# Altium PCB HSens.PcbDoc
Units mil, origin at the board's own origin, x right, y up, seen from the top; angles counter-clockwise.
Board outline 1750 x 1600 mil, 2 copper layers (Top Layer, Bottom Layer); 27 components, 40 nets, 133 pads, 15 vias.
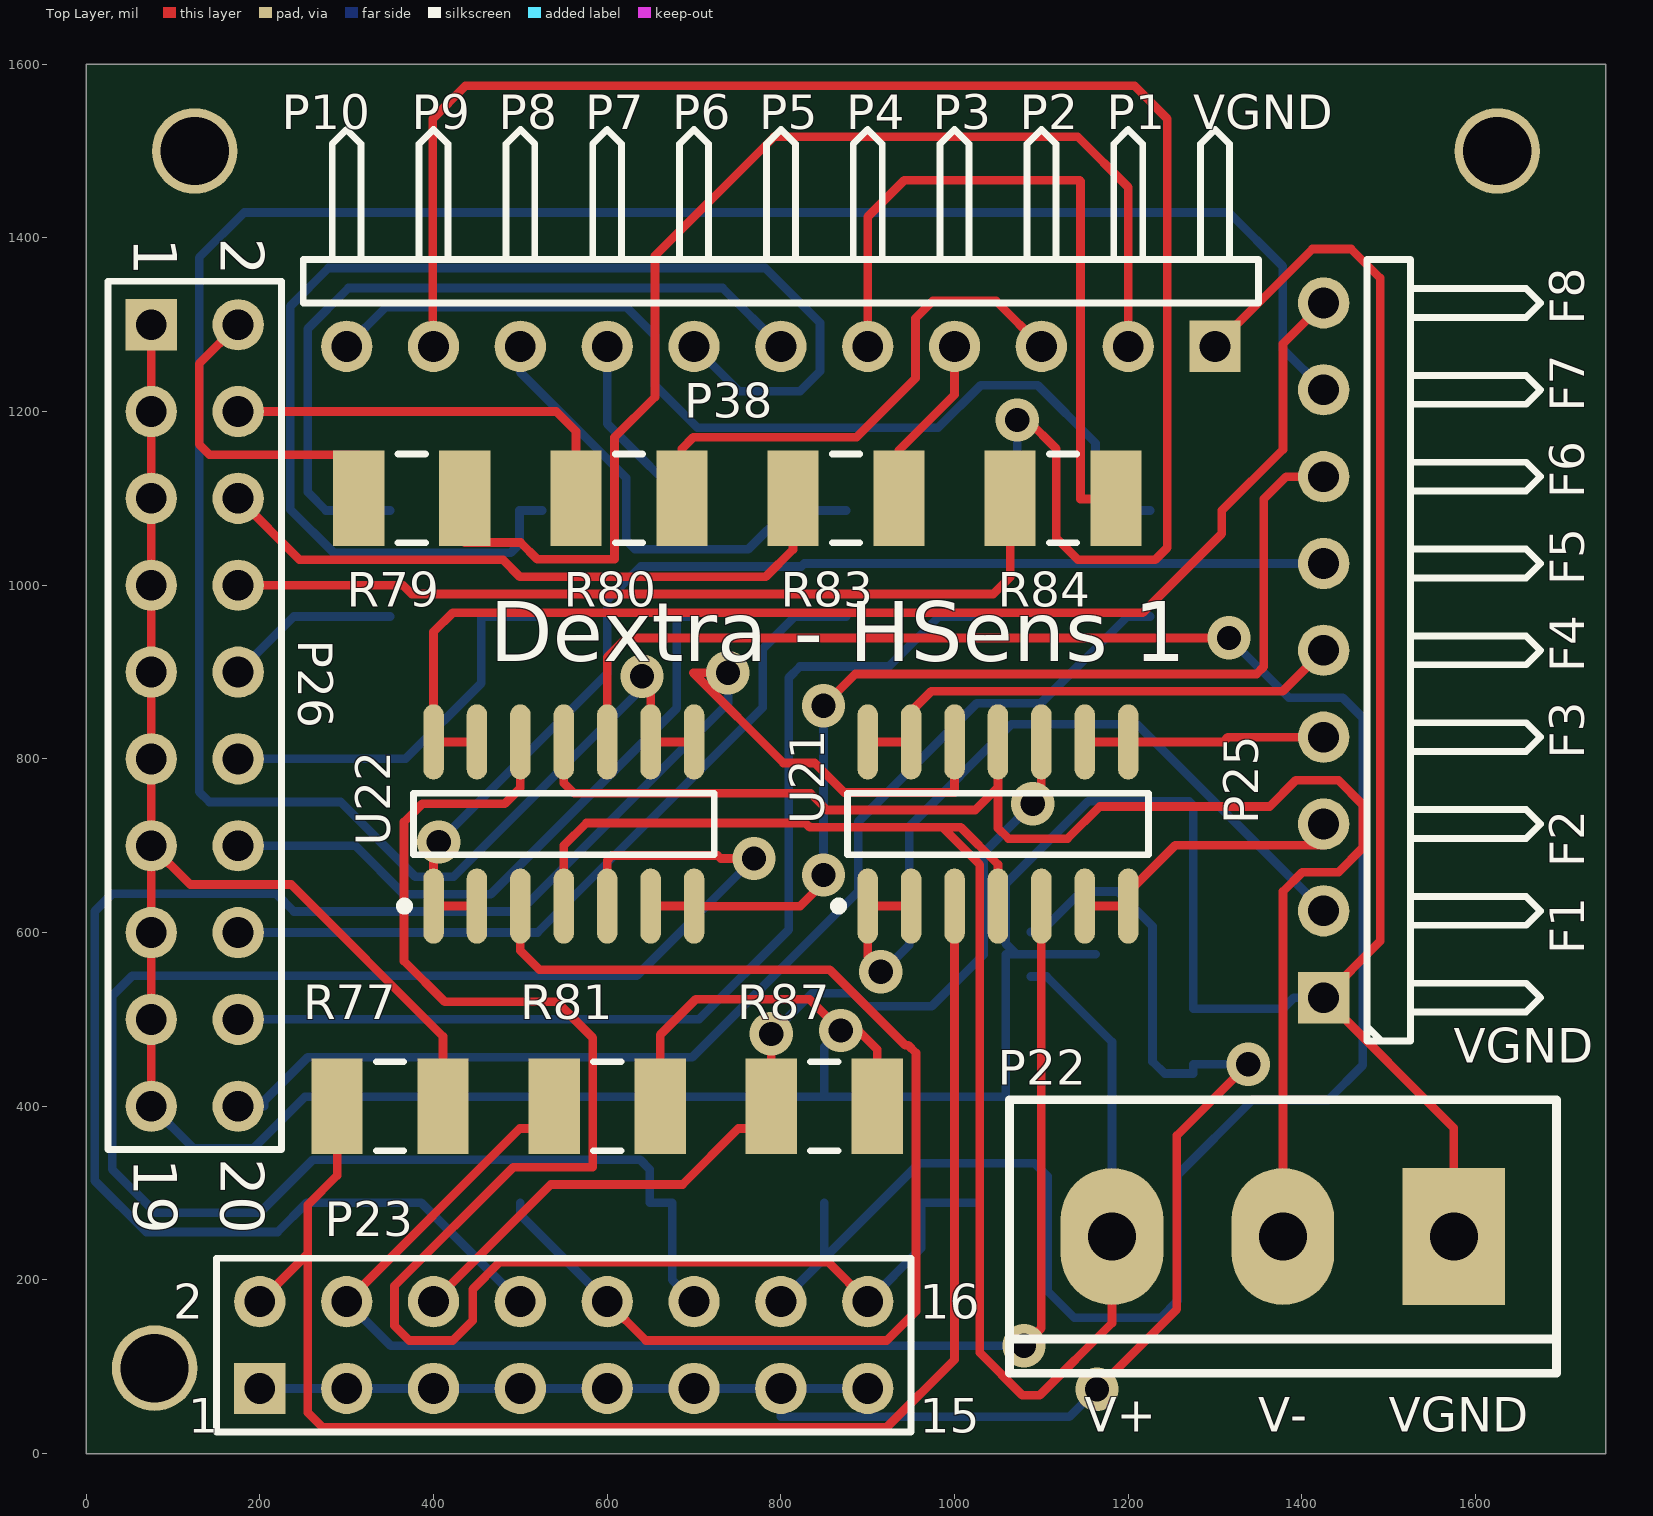
[diagram p0: Top Layer view]
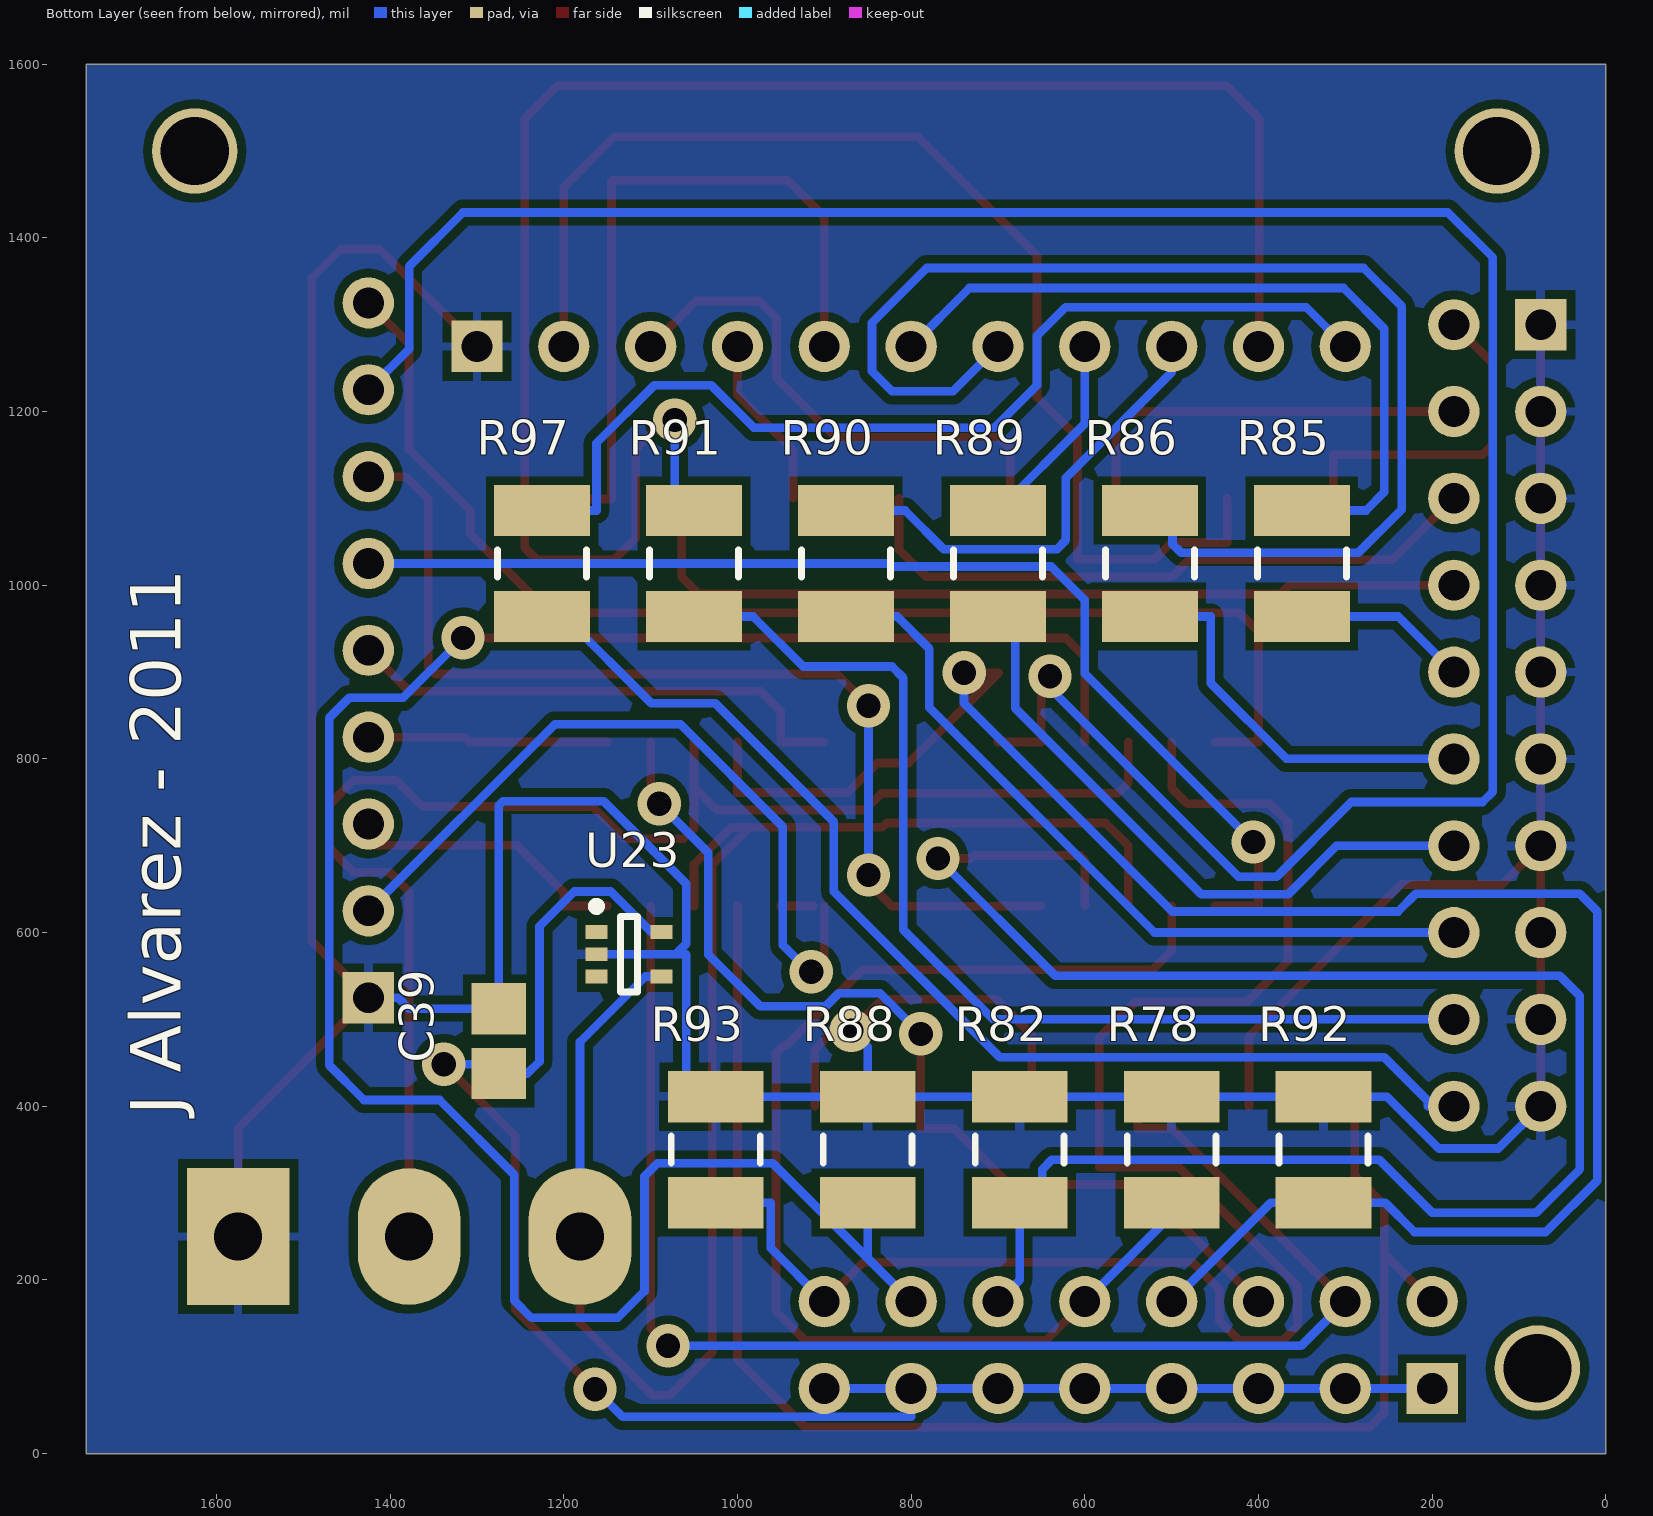
[diagram p1: Bottom Layer view, seen from below]

## Layer stack, top to bottom
Top Layer: signal copper 1.4
Dielectric: dielectric 12.6, FR-4, Dk 4.8
Bottom Layer: signal copper 1.4

## Board outline
0,1600 1750,1600 1750,0 0,0 0,1600

## Design rules (kind name [scope] priority, off if disabled: settings)
Clearance [All] p1: gap=10
HoleToHoleClearance [All] p1: gap=4 allowstackedmicrovias=TRUE
MinimumSolderMaskSliver [All] p1: minsoldermaskwidth=8
PolygonConnect [All] p1: connectstyle=Relief reliefconductorwidth=10 reliefentries=4 polygonreliefangle="90 Angle"
RoomDefinition HSens [InComponentClass('HSens')] p1: confinementstyle=ConfineIn formatcopy=TRUE lockcomponents=FALSE outline 0,0 1750,0 1750,1600 0,1600
RoutingVias [All] p1: holewidth=28 width=50 viastyle="Through Hole" minholewidth=28 minwidth=50 maxholewidth=28 maxwidth=50
SilkToSilkClearance [All] p1: silktosilkclearance=4
SilkscreenOverComponentPads [All] p1: minsilkscreentomaskgap=10
SolderMaskExpansion [All] p1: expansion=4
ViasUnderSMD [All] p1: allowed=FALSE
Width [All] p1: maxlimit=10 minlimit=10 preferedwidth=10
24 further rules are at their usual default settings.

## Components (designator, comment, footprint, x,y, rotation, side; value= is the part's Value field where it differs from the comment)
C39 "Cap Semi" CAPC2012M 1275,475 r90 bottom
P22 "VIN" AZUL5-3 1575,250 r180 top
P23 "FSR INPUT" HDR2X8 200,75 r0 top
P25 "FSR OUT" HDR1X9H 1425,525 r90 top
P26 "PB IN" HDR2X10 75,1300 r270 top
P38 "PB OUT" HDR1X11H 1300,1275 r180 top
R77 "Res3" RESC3225M 350,400 r0 top
R78 "Res3" RESC3225M 500,350 r90 bottom
R79 "Res3" RESC3225M 375,1100 r0 top
R80 "Res3" RESC3225M 625,1100 r0 top
R81 "Res3" RESC3225M 600,400 r0 top
R82 "Res3" RESC3225M 675,350 r90 bottom
R83 "Res3" RESC3225M 875,1100 r0 top
R84 "Res3" RESC3225M 1125,1100 r0 top
R85 "Res3" RESC3225M 350,1025 r90 bottom
R86 "Res3" RESC3225M 525,1025 r90 bottom
R87 "Res3" RESC3225M 850,400 r0 top
R88 "Res3" RESC3225M 850,350 r90 bottom
R89 "Res3" RESC3225M 700,1025 r90 bottom
R90 "Res3" RESC3225M 875,1025 r90 bottom
R91 "Res3" RESC3225M 1050,1025 r90 bottom
R92 "Res3" RESC3225M 325,350 r90 bottom
R93 "Res3" RESC3225M 1025,350 r90 bottom
R97 "Res3" RESC3225M 1225,1025 r90 bottom
U21 "TL084ACD" SO14_N 1050,725 r90 top
U22 "TL084ACD" SO14_N 550,725 r90 top
U23 "TPS71550" SOT353-5L 1125,575 r180 bottom

## Footprints (in the part's own frame and the unit in brackets; to place one, negate y for a bottom-side part, rotate by r counter-clockwise, add the part's x,y. Pads: shape width x height; smd on the part's side, far side on the other; paste and mask are expansions set on the pad)
AZUL5-3 [mm]
  rect 3x4 hole 1.4: 1(0,0)
  oval 3x4 hole 1.4: 2(5,0) 3(10,0)
  silkscreen extent -3,-4 13,4
CAPC2012M [mm] "Chip Capacitor, Body 2.0x1.3mm, IPC Low Density"
  rect 1.5x1.6 smd: 1(-0.95,0) 2(0.95,0)
  body extent -1.1,-0.72 1.1,0.72, height 1.1
HDR1X9H [mm] "Connector; Header; 9 Position; Right Angle"
  rect 1.5x1.5 hole 0.9: 1(0,0)
  round 1.5 hole 0.9: 2(2.54,0) 3(5.08,0) 4(7.62,0) 5(10.16,0) 6(12.7,0) 7(15.24,0) 8(17.78,0) 9(20.32,0)
  silkscreen extent -1.27,-6.35 21.59,-1.27
HDR1X11H [mm] "Connector; Header; 11 Position; Right Angle"
  rect 1.5x1.5 hole 0.9: 1(0,0)
  round 1.5 hole 0.9: 2(2.54,0) 3(5.08,0) 4(7.62,0) 5(10.16,0) 6(12.7,0) 7(15.24,0) 8(17.78,0) 9(20.32,0) 10(22.86,0) 11(25.4,0)
  silkscreen extent -1.27,-6.35 26.67,-1.27
HDR2X8 [mm] "Connector; Header; 8x2 Position"
  rect 1.5x1.5 hole 0.9: 1(0,0)
  round 1.5 hole 0.9: 2(0,2.54) 3(2.54,0) 4(2.54,2.54) 5(5.08,0) 6(5.08,2.54) 7(7.62,0) 8(7.62,2.54) 9(10.16,0) 10(10.16,2.54) 11(12.7,0) 12(12.7,2.54) 13(15.24,0) 14(15.24,2.54) 15(17.78,0) 16(17.78,2.54)
  silkscreen extent -1.27,-1.27 19.05,3.81
HDR2X10 [mm] "Connector; Header; 10x2 Position"
  rect 1.5x1.5 hole 0.9: 1(0,0)
  round 1.5 hole 0.9: 2(0,2.54) 3(2.54,0) 4(2.54,2.54) 5(5.08,0) 6(5.08,2.54) 7(7.62,0) 8(7.62,2.54) 9(10.16,0) 10(10.16,2.54) 11(12.7,0) 12(12.7,2.54) 13(15.24,0) 14(15.24,2.54) 15(17.78,0) 16(17.78,2.54) 17(20.32,0) 18(20.32,2.54) 19(22.86,0) 20(22.86,2.54)
  silkscreen extent -1.27,-1.27 24.13,3.81
RESC3225M [mm] "Chip Resistor, Body 3.2x2.5mm, IPC Low Density"
  rect 1.5x2.8 smd: 1(-1.55,0) 2(1.55,0)
  silkscreen extent -0.4,-1.3 0.4,1.3, body extent -1.68,-1.32 1.68,1.32, height 0.71
SO14_N [mm] "SOIC, 14-Leads, Body 8.7x3.9mm, Pitch 1.27mm, IPC Medium Density"
  oval 2.2x0.6 smd: 1(-2.4,3.81) 2(-2.4,2.54) 3(-2.4,1.27) 4(-2.4,0) 5(-2.4,-1.27) 6(-2.4,-2.54) 7(-2.4,-3.81) 8(2.4,-3.81) 9(2.4,-2.54) 10(2.4,-1.27) 11(2.4,0) 12(2.4,1.27) 13(2.4,2.54) 14(2.4,3.81)
  silkscreen extent -2.52,-4.4 0.9,4.78, body extent -1.95,-4.33 1.95,4.33, height 1.75
SOT353-5L [mm] "SOT353, 5-Leads, Body 2x1.3mm, Pitch 0.65mm, Lead Span 2.1mm, IPC High Density"
  rect 0.65x0.4 smd: 1(-0.95,0.65) 2(-0.95,0) 3(-0.95,-0.65) 4(0.95,-0.65) 5(0.95,0.65)
  silkscreen extent -1.07,-1.1 0.25,1.52, body extent -0.7,-1.1 0.7,1.1, height 1.1

## Part data
C39: "Capacitor (Semiconductor SIM Model)"
P22: library part "Header 3", "Header, 3-Pin"
P23: library part "Header 8X2", "Header, 8-Pin, Dual row"
P25: library part "Header 9H", "Header, 9-Pin, Right Angle"
P26: library part "Header 10X2", "Header, 10-Pin, Dual row"
P38: library part "Header 11H", "Header, 11-Pin, Right Angle"
R77 R78 R79 R80 R81 R82 R83 R84 R85 R86 R87 R88 R89 R90 R91 R92 R93 R97: "Resistor"
U21 U22: "General-Purpose J-FET Quad Operational Amplifier"

## Free pads (board coordinates)
  round 98.43 hole 78.74: 20(1625,1500) 21(125,1500) 22(78.74,98.43)

## Via types
v1: diameter 50, hole 28, Top Layer to Bottom Layer, 15 vias

## Nets (pads, with @x,y where several pads share a name; then routed paths per layer and width w, separated by ;. In a path a pad name is that pad's centre, name@x,y a point inside that pad or via, vN(x,y) a via of type N, cw(c..) or ccw(c..) an arc to the next point about the centre after c; other vN are vias at no path point)
FSR11: C39.1 P23.1 P23.3 P23.5 P23.7 P23.9 P23.11 P23.13 P23.15 U23.5 | length 2014.6
  Top Layer w10: v1(1164.05,74.24) 1256.05,166.24 1256.05,366.24 v1(1338.05,448.24)
  Bottom Layer w10: P23.1 P23.3 P23.5 P23.7 P23.9 P23.11 P23.13 ; P23.15 P23.13 ; U23.5 1099.39,600.59 1146.05,647.24 1188.05,647.24 1228.05,607.24 1228.05,451.6 1242.05,437.6 C39.1 1275,448.24 v1(1338.05,448.24) ; v1(1164.05,74.24) 1132.05,42.24 800,42.24 P23.13
FSR12: P23.2 R77.1 U21.3 | length 1751.3
  Top Layer w10: P23.2 255.05,230.05 ; R77.1 288.98,320.17 255.05,286.24 255.05,230.05 ; U21.3 1000,108.2 922.05,30.24 272.05,30.24 255.05,47.24 255.05,230.05
FSR22: P23.4 R81.1 U21.5 | length 1662.8
  Top Layer w10: P23.4 499.24,374.24 538.98,374.24 R81.1 ; v1(1080,124.24) 1100,144.24 U21.5
  Bottom Layer w10: P23.4 350.76,124.24 v1(1080,124.24)
FSR32: P23.6 R87.1 U21.10 | length 1147.7
  Top Layer w10: P23.6 534.88,309.88 686.68,309.88 751.05,374.24 788.98,374.24 R87.1 788.98,483.17 v1(789.05,483.24) ; v1(1090.05,748.24) 1100,758.2 U21.10
  Bottom Layer w10: v1(789.05,483.24) 835.92,530.12 883.31,530.12 898.43,515 973.8,515 1033.61,574.81 1033.61,691.81 v1(1090.05,748.24)
FSR42: P23.8 R92.1 U21.12 | length 2222.6
  Top Layer w10: v1(739.05,899.24) 699.05,899.24 803.05,795.24 838.98,795.24 873.05,761.18 1000,761.18 U21.12
  Bottom Layer w10: P23.8 386.02,288.98 R92.1 254.05,288.98 220.32,255.24 69.05,255.24 10.05,314.24 10.05,624.53 30.05,644.53 219.05,644.53 239.33,624.24 499.38,624.24 739.05,863.91 v1(739.05,899.24)
FSR52: P23.10 R78.1 U22.3 | length 1396.6
  Top Layer w10: U22.3 500,579.29 522.05,557.24 856.19,557.24 943.31,470.12 946.76,470.12 955.55,461.33 955.55,457.88 955.55,163.75 922.05,130.24 644.76,130.24 P23.10
  Bottom Layer w10: R78.1 500,275 P23.10
FSR62: P23.12 R82.1 U22.5 | length 2088.1
  Top Layer w10: U22.5 600,683.24 605.58,688.82 727.05,688.82 730.62,685.24 v1(769.05,685.24)
  Bottom Layer w10: P23.12 675,200 R82.1 649.05,288.98 649.05,327.24 638.05,338.24 261.05,338.24 200.05,277.24 80.05,277.24 30.05,327.24 30.05,527.24 53.05,550.24 634.05,550.24 v1(769.05,685.24)
FSR72: P23.14 R88.1 U22.10 | length 2571.5
  Top Layer w10: U22.10 600,917.2 622.05,939.24 v1(1316.05,939.24)
  Bottom Layer w10: P23.14 850,225 ; R88.1 850,225 ; v1(1316.05,939.24) 1385.05,870.24 1447.05,870.24 1470.05,847.24 1470.05,447.24 1430.05,407.24 1343.05,407.24 1257.05,321.24 1257.05,176.24 1237.05,156.24 1138.05,156.24 1107.05,187.24 1107.05,319.24 1092.05,334.24 959.24,334.24 850,225
FSR82: P23.16 R93.1 U22.12 | length 1929.3
  Top Layer w10: U22.12 500,766.2 482.05,748.24 387.05,748.24 366.05,727.24 366.05,567.24 413.05,520.24 542.05,520.24 583.51,478.78 583.51,329.88 491.68,329.88 355.05,193.24 355.05,147.24 372.05,130.24 422.05,130.24 445.05,153.24 445.05,189.24 476.05,220.24 854.76,220.24 P23.16
  Bottom Layer w10: P23.16 961.78,236.78 961.78,288.98 R93.1
PB11: C39.2 P22.1 P25.1 P26.1 P26.3 P26.5 P26.7 P26.9 P26.11 P26.13 P26.15 P26.17 P26.19 P38.1 R77.2 R78.2 R81.2 R82.2 R87.2 R88.2 R92.2 R93.2 U23.2 | length 5402.3
  Top Layer w10: P26.19 P26.17 P26.15 P26.13 ; P26.1 P26.3 P26.5 P26.7 P26.9 P26.11 P26.13 ; R77.2 411.02,480.24 236.02,655.24 119.76,655.24 P26.13 ; R81.2 661.02,482.22 702.05,523.24 833.05,523.24 v1(869.05,487.24) 889.02,487.24 911.02,465.24 R87.2 ; P38.1 1412.24,1387.24 1456.64,1387.24 1490.05,1353.83 1490.05,590.05 P25.1 1575,375 P22.1
  Bottom Layer w10: P26.19 123.76,351.24 192.27,351.24 252.05,411.02 R92.2 R78.2 R82.2 R88.2 ; v1(869.05,487.24) 850,468.2 R88.2 ; U23.2 1071.29,575 ; P25.1 1390.75,525 1378.15,512.4 C39.2 1275,746.29 1270.05,751.24 1154.05,751.24 1059.05,656.24 1059.05,587.24 1071.29,575 ; R88.2 R93.2 1059.05,411.02 1059.05,575 1071.29,575
PB12: P26.2 R79.1 | length 395.5
  Top Layer w10: P26.2 130.05,1255.05 130.05,1162.24 142.05,1150.24 313.98,1150.24 R79.1
PB22: P26.4 R80.1 | length 475.7
  Top Layer w10: P26.4 541.29,1200 563.98,1177.31 R80.1
PB32: P26.6 R83.1 | length 748.1
  Top Layer w10: P26.6 245.76,1029.24 480.08,1029.24 499.45,1009.88 782.68,1009.88 813.98,1041.17 R83.1
PB42: P26.8 R84.1 | length 991.9
  Top Layer w10: P26.8 364.8,1000 374.92,989.88 1044.61,989.88 1063.98,1009.24 R84.1
PB52: P26.10 R85.1 | length 201.5
  Bottom Layer w10: P26.10 238.98,963.98 R85.1
PB62: P26.12 R86.1 | length 462.9
  Bottom Layer w10: P26.12 367.8,800 455.05,887.24 455.05,963.98 R86.1
PB72: P26.14 R89.1 | length 742.5
  Bottom Layer w10: P26.14 310.08,700 365.83,644.24 466.05,644.24 680.05,858.24 680.05,963.98 R89.1
PB82: P26.16 R90.1 | length 890.4
  Bottom Layer w10: P26.16 519.8,600 779.05,859.24 779.05,926.98 816.05,963.98 R90.1
PB92: P26.18 R91.1 | length 1237.1
  Bottom Layer w10: P26.18 705.8,500 809.05,603.24 809.05,893.3 822.05,906.3 924.37,906.3 982.05,963.98 R91.1
PB102: P26.20 R97.1 | length 1334.4
  Bottom Layer w10: P26.20 205.05,400 205.05,406.24 255.05,456.24 698.05,456.24 889.05,647.24 889.05,727.63 1025.61,864.19 1099.26,864.19 1199.05,963.98 R97.1
PBOUT1: P38.2 R79.2 | length 1408.9
  Top Layer w10: R79.2 436.02,1049.24 500.08,1049.24 519.45,1029.88 608.51,1029.88 608.51,1170.24 655.05,1216.78 655.05,1379.24 792.05,1516.24 1142.05,1516.24 1200,1458.29 P38.2
PBOUT2: P38.3 R80.2 | length 603.7
  Top Layer w10: R80.2 686.02,1157.24 699.02,1170.24 887.05,1170.24 955.05,1238.24 955.05,1307.24 975.05,1327.24 1047.76,1327.24 P38.3
PBOUT3: P38.4 R83.2 | length 201.5
  Top Layer w10: R83.2 936.02,1155.24 1000,1219.22 P38.4
PBOUT4: P38.5 R84.2 | length 819.7
  Top Layer w10: P38.5 900,1424.15 942.05,1466.2 1144.1,1466.2 1145.05,1465.24 1145.05,1099.24 1186.02,1099.24 R84.2
PBOUT5: P38.6 R85.2 | length 884
  Bottom Layer w10: R85.2 276.27,1086.02 255.05,1107.24 255.05,1295.24 302.05,1342.24 732.76,1342.24 P38.6
PBOUT6: P38.7 R86.2 | length 1473.9
  Bottom Layer w10: R86.2 499.05,1086.02 499.05,1047.24 489.05,1037.24 285.05,1037.24 235.05,1087.24 235.05,1321.24 279.05,1365.24 782.05,1365.24 845.05,1302.24 845.05,1246.24 822.05,1223.24 751.76,1223.24 P38.7
PBOUT7: P38.8 R89.2 | length 230.4
  Bottom Layer w10: P38.8 600,1186.02 R89.2
PBOUT8: P38.9 R90.2 | length 549.6
  Bottom Layer w10: P38.9 500,1245.29 621.8,1123.49 621.8,1051.74 632.05,1041.49 762.52,1041.49 807.05,1086.02 R90.2
PBOUT9: P38.10 R91.2 | length 2066.6
  Top Layer w10: P38.10 399.05,1275 399.05,1537.24 436.8,1575 1207.29,1575 1245.05,1537.24 1245.05,1043.24 1231.05,1029.24 1142.05,1029.24 1117.05,1054.24 1117.05,1157.24 1084.05,1190.24 v1(1072.05,1190.24)
  Bottom Layer w10: R91.2 1072.05,1086.02 v1(1072.05,1190.24)
PBOUT10: P38.11 R97.2 | length 1160.2
  Bottom Layer w10: P38.11 345.24,1320.24 622.05,1320.24 655.05,1287.24 655.05,1230.24 704.05,1181.24 981.05,1181.24 1030.05,1230.24 1095.66,1230.24 1162.27,1163.63 1162.27,1086.02 R97.2
V+: P22.3 U21.4 U22.4 U23.4 | length 1926.3
  Top Layer w10: U22.4 550,700.2 576.05,726.24 828.12,726.24 833.19,721.18 986.11,721.18 ; U21.4 1050,678.29 1007.11,721.18 986.11,721.18 ; P22.3 1181.3,150.44 1098.1,67.24 1078.1,67.24 1029.05,116.3 1029.05,678.24 986.11,721.18
  Bottom Layer w10: U23.4 1105.88,549.41 1181.3,473.99 P22.3
V-: P22.2 U21.11 U22.11 | length 1694.3
  Top Layer w10: U22.11 550,772.29 562.05,760.24 834.12,760.24 853.19,741.18 1023.94,741.18 1050,767.24 ; U21.11 1050,767.24 ; P22.2 1378.15,647.35 1400.33,669.53 1442.05,669.53 1470.05,697.53 1470.05,747.24 1442.05,775.24 1393.05,775.24 1363.05,745.24 1167.06,745.24 1130,708.18 1062.05,708.18 1050,720.23 1050,767.24
VOFSR1: P25.2 U21.1 U21.2 | length 919.4
  Top Layer w10: U21.1 900,572.09 917.09,555 v1(915,555) ; 912.05,630.51 U21.2
  Bottom Layer w10: v1(915,555) 917.09,555 947.77,585.68 947.77,721.96 1065.6,839.79 1210.21,839.79 P25.2
VOFSR2: P25.3 U21.6 U21.7 | length 337.7
  Top Layer w10: U21.6 U21.7 1200,646.24 1254.23,700.47 1425,700.47 P25.3
VOFSR3: P25.4 U21.8 U21.9 | length 277.3
  Top Layer w10: U21.9 U21.8 1309.05,819.49 1314.56,825 P25.4
VOFSR4: P25.5 U21.13 U21.14 | length 589.4
  Top Layer w10: U21.14 U21.13 950,854.75 973.05,877.8 1377.8,877.8 P25.5
VOFSR5: P25.6 U22.1 U22.2 | length 1327.7
  Top Layer w10: v1(406.05,704.24) 400,698.2 U22.1 U22.2
  Bottom Layer w10: v1(406.05,704.24) 600,898.2 600,982.95 638.54,1021.49 823.58,1021.49 827.08,1025 P25.6
VOFSR6: P25.7 U22.6 U22.7 | length 1212.9
  Top Layer w10: U22.6 U22.7 700,630.24 822.05,630.24 849.05,657.24 v1(849.05,666.24) ; v1(849.05,861.24) 885.6,897.8 1347.78,897.8 1356.05,906.07 1356.05,1099.24 1381.8,1125 P25.7
  Bottom Layer w10: v1(849.05,666.24) v1(849.05,861.24)
VOFSR7: P25.8 U22.8 U22.9 | length 2856.3
  Top Layer w10: v1(640.05,895.24) 650,885.29 U22.9 U22.8
  Bottom Layer w10: v1(640.05,895.24) 640.05,881.24 423.05,664.24 379.05,664.24 293.05,750.24 142.05,750.24 130.05,762.24 130.05,1377.24 182.05,1429.24 1316.05,1429.24 1378.05,1367.24 1378.05,1271.95 P25.8
VOFSR8: P25.9 U22.13 U22.14 | length 1445.6
  Top Layer w10: U22.13 U22.14 400,946.24 422,968.24 1216.64,968.24 1307.74,1059.34 1307.74,1085.94 1378.15,1156.34 1378.15,1278.15 P25.9
pads on no net: U23.1 U23.3

## Polygon pours and split planes (outlines as drawn)
PB11 on Bottom Layer "Bottom Overlay-No Net" (solid, pour order 4): 0,1600 1750,1600 1750,0 0,0 0,1600

## Silkscreen, mask and mechanical layers (free items; w line width, h text height)
Top Overlay:
  text "P10" at 225,1525 h39.37
  text "P9" at 375,1525 h39.37
  text "P8" at 475,1525 h39.37
  text "P7" at 575,1525 h39.37
  text "P6" at 675,1525 h39.37
  text "P5" at 775,1525 h39.37
  text "P4" at 875,1525 h39.37
  text "P3" at 975,1525 h39.37
  text "P2" at 1075,1525 h39.37
  text "P1" at 1175,1525 h39.37
  text "VGND" at 1275,1525 h39.37
  text "F8" at 1725,1300 h39.37 r90
  text "F7" at 1725,1200 h39.37 r90
  text "F6" at 1725,1100 h39.37 r90
  text "F5" at 1725,1000 h39.37 r90
  text "F4" at 1725,900 h39.37 r90
  text "Dextra - HSens 1" at 464.57,889.76 h118.11
  text "F3" at 1725,800 h39.37 r90
  text "F2" at 1725,675 h39.37 r90
  text "F1" at 1725,575 h39.37 r90
  text "VGND" at 1575,450 h39.37
  text "V+" at 1150,25 h39.37
  text "V-" at 1350,25 h39.37
  text "VGND" at 1500,25 h39.37
Bottom Overlay:
  text "J Alvarez - 2011" at 1622.05,389.76 h100 r270

## Text inside footprints (layer, text, board x,y; h text height)
P23: Top Overlay "16" at 960,155 h39.37; Top Overlay "2" at 100,155 h39.37; Top Overlay "1" at 117.32,23.82 h39.37; Top Overlay "15" at 959.84,23.82 h39.37
P26: Top Overlay "20" at 155,340 h50 r270; Top Overlay "19" at 55,340 h50 r270; Top Overlay "1" at 55,1400 h50 r270; Top Overlay "2" at 155,1400 h50 r270